# Altium PCB Effect_PCB.PcbDoc
Units mm, origin at the board's own origin, x right, y up, seen from the top; angles counter-clockwise.
Board outline 16 x 16 mm, 2 copper layers (Top Layer, Bottom Layer); 8 components, 6 nets, 18 pads, 5 vias.
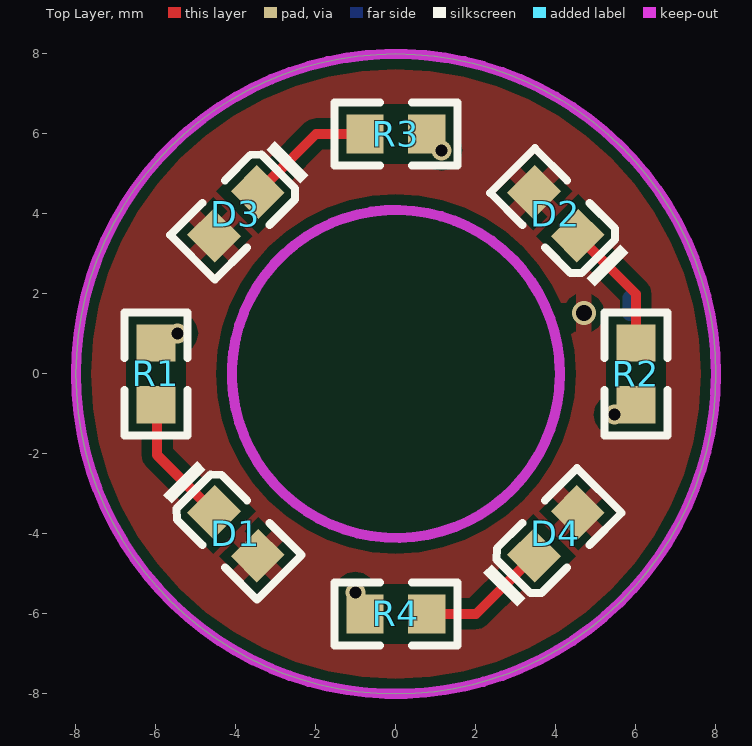
[diagram p0: Top Layer view]
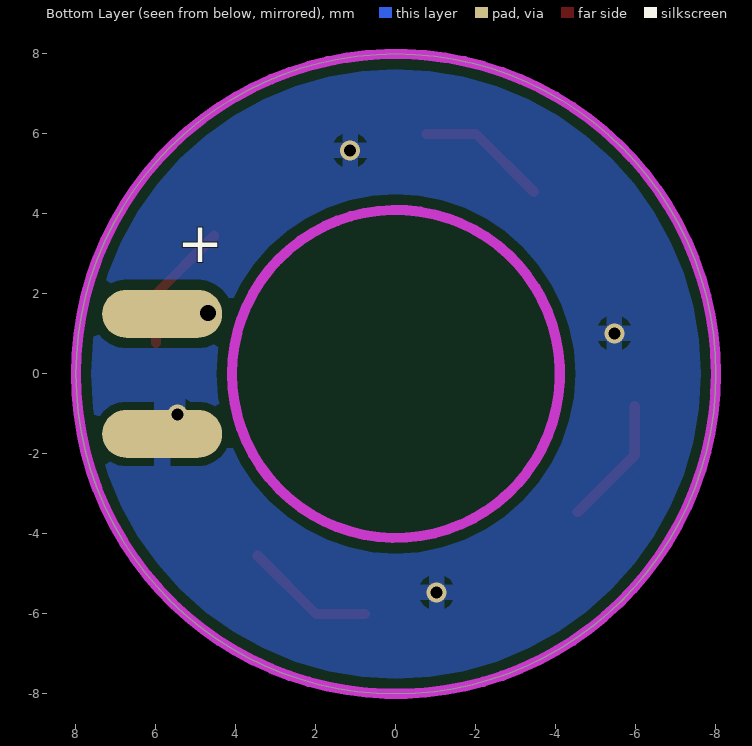
[diagram p1: Bottom Layer view, seen from below]
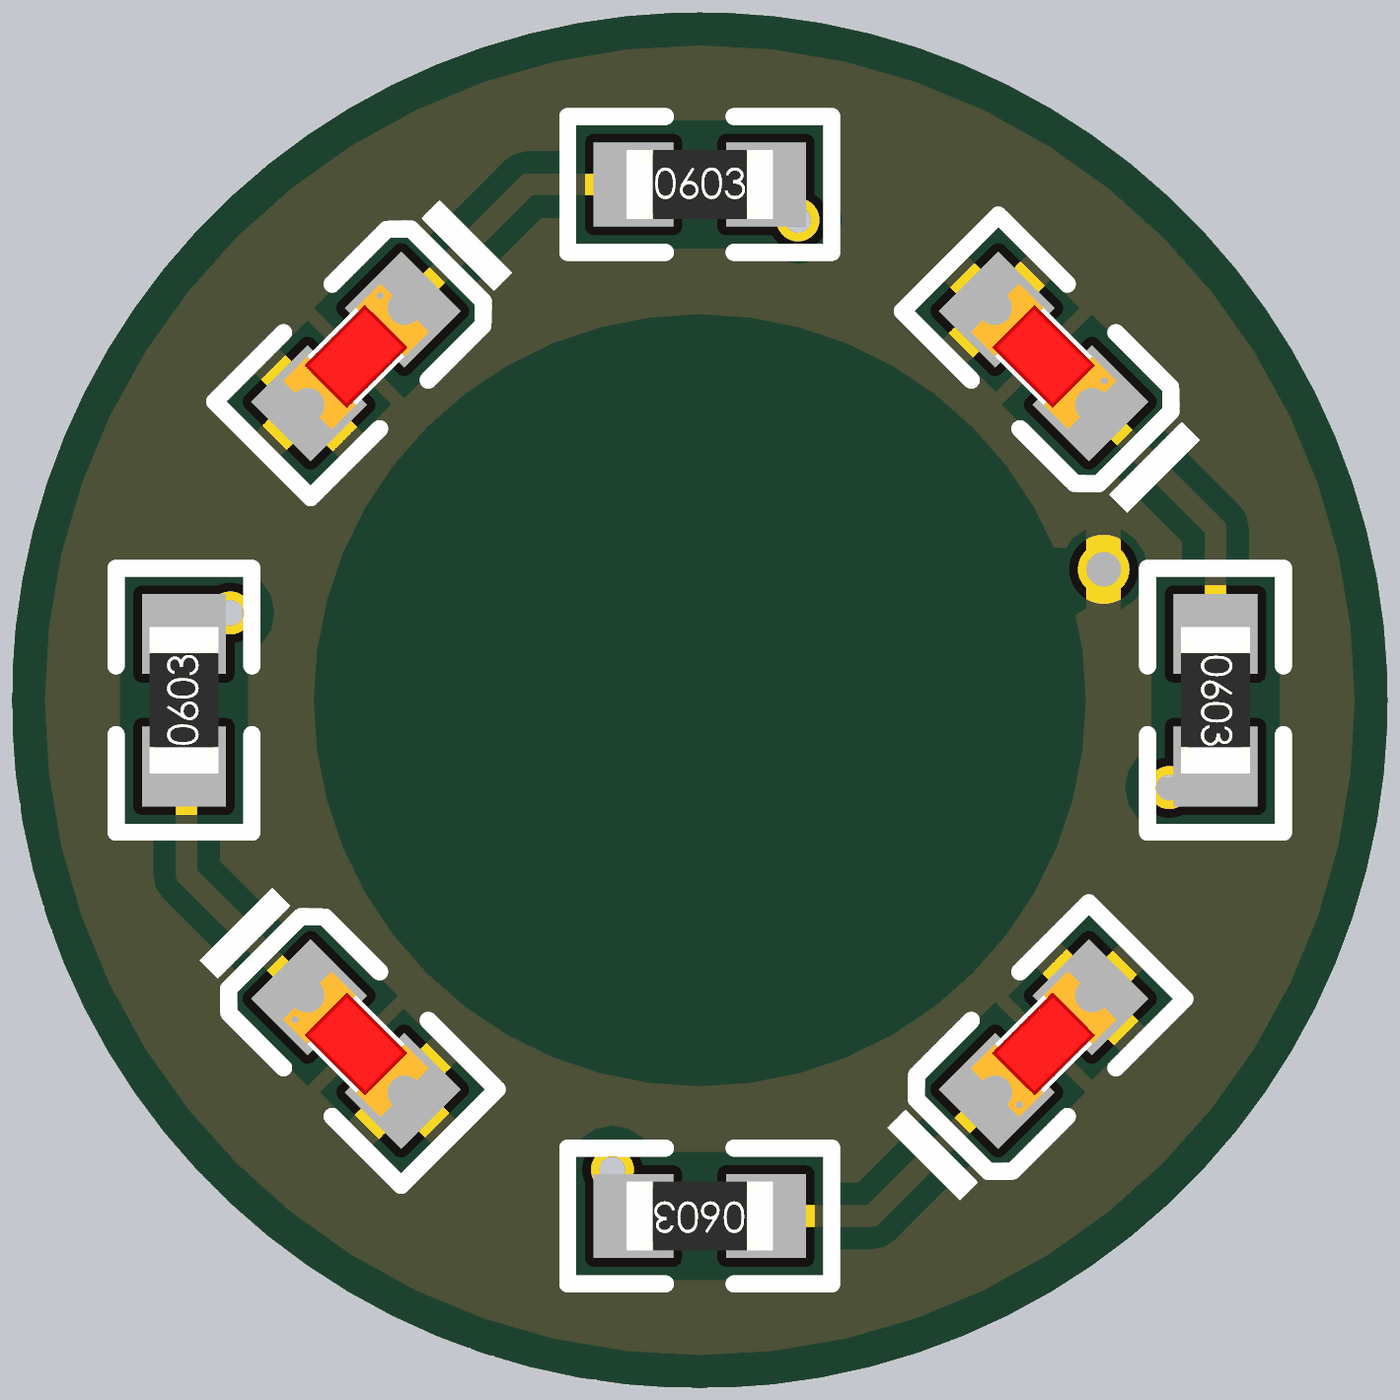
[diagram p2: 3D render of the assembled board from above, using the file's embedded part models]

## Layer stack, top to bottom
Top Solder: solder mask 0.0102, Solder Resist, Dk 3.5
Top Layer: signal copper 0.0356
Dielectric 1: dielectric 0.32, FR-4, Dk 4.8
Bottom Layer: signal copper 0.0356
Bottom Solder: solder mask 0.0102, Solder Resist, Dk 3.5

## Board outline
-8,0 ccw(c0,0) 0,-8 ccw(c0,0) 8,0 ccw(c0,0) 0,8 ccw(c0,0)

## Design rules (kind name [scope] priority, off if disabled: settings)
Clearance [All] p1: gap=0.254 ignorepadtopadclearanceinfootprint=FALSE except(0: Arc-Hole Track-Hole SMDPad-Hole THPad-Hole Via-Hole Fill-Hole Poly-Hole Region-Hole Text-Hole)
PlaneConnect [All] p1: planeconnectstyle=Relief reliefexpansion=0.508 reliefentries=4 reliefconductorwidth=0.34 reliefairgap=0.254
PolygonConnect [All] p1: connectstyle=Relief reliefconductorwidth=0.4 reliefentries=4 polygonreliefangle="90 Angle" airgapwidth=0.2
RoutingVias [All] p1: holewidth=0.711 width=1.27 viastyle="Through Hole" minholewidth=0.711 minwidth=1.27 maxholewidth=0.711 maxwidth=1.27
SolderMaskExpansion [All] p1: expansion=0.102
Width [All] p1: maxlimit=0.5 minlimit=0.254 preferedwidth=0.254
29 further rules are at their usual default settings.

## Components (designator, comment, footprint, x,y, rotation, side; value= is the part's Value field where it differs from the comment)
D1 "白灯 0603" 0603_LED_S1 -4,-4 r315 top
D2 "白灯 0603" 0603_LED_S1 4,4 r135 top
D3 "白灯 0603" 0603_LED_S1 -4,4 r225 top
D4 "白灯 0603" 0603_LED_S1 4,-4 r45 top
R1 "0Ω (0R0) ±1%" 0603_R -6,0 r90 top
R2 "0Ω (0R0) ±1%" 0603_R 6,0 r270 top
R3 "0Ω (0R0) ±1%" 0603_R 0,6 r0 top
R4 "0Ω (0R0) ±1%" 0603_R 0,-6 r180 top

## Footprints (in the part's own frame and the unit in brackets; to place one, negate y for a bottom-side part, rotate by r counter-clockwise, add the part's x,y. Pads: shape width x height; smd on the part's side, far side on the other; paste and mask are expansions set on the pad)
0603_LED_S1 [mm]
  rect 0.93x0.98 smd: A(0.77,0) K(-0.77,0)
  silkscreen extent -1.97,-0.79 1.54,0.79, body extent -0.8,-0.4 0.8,0.4, height 0.6
0603_R [mm]
  rect 0.93x0.98 smd: 1(-0.77,0) 2(0.77,0)
  silkscreen extent -1.53,-0.79 1.54,0.79, body extent -0.85,-0.4 0.85,0.4, height 0.56

## Part data
D1 D2 D3 D4: library part "0603 白灯", "发光二极管"
R1 R2 R3 R4: library part "0603 0Ω (0R0) 1%", "贴片电阻"

## Free pads (board coordinates)
  oval 3x1.2 smd far side: 0(5.842,1.5) 1(5.842,-1.5)

## Via types
v1: diameter 0.5, hole 0.3, Top Layer to Bottom Layer, 4 vias
v2: diameter 0.6, hole 0.4, Top Layer to Bottom Layer, 1 vias

## Nets (pads, with @x,y where several pads share a name; then routed paths per layer and width w, separated by ;. In a path a pad name is that pad's centre, name@x,y a point inside that pad or via, vN(x,y) a via of type N, cw(c..) or ccw(c..) an arc to the next point about the centre after c; other vN are vias at no path point)
3.3V: D1.A D2.A D3.A D4.A pad.0 | length 0.4
  Bottom Layer w0.35: pad.0 pad.0@5.842,1.905
  other v2: 4.699,1.524
GND: pad.1 R1.2 R2.2 R3.2 R4.2
  other v1: -1.016,-5.461 5.461,-1.016 -5.461,1.016 1.143,5.588
NetD1_K: D1.K R1.1 | length 3.2
  Top Layer w0.254: R1.1@-5.969,-0.801 -5.969,-2.031 D1.K
NetD2_K: D2.K R2.1 | length 3.3
  Top Layer w0.254: D2.K 6,2 R2.1
NetD3_K: D3.K R3.1 | length 3.3
  Top Layer w0.254: D3.K -2,6 R3.1
NetD4_K: D4.K R4.1 | length 3.3
  Top Layer w0.254: R4.1 2,-6 D4.K

## Polygon pours and split planes (outlines as drawn)
3.3V on Top Layer "GND" (solid, remove dead copper, pour order 2): -9.398,9.017 -9.271,9.144 10.287,9.144 10.287,-8.763 9.652,-9.398 9.398,-9.652 -8.763,-9.652
GND on Bottom Layer "GND" (solid, remove dead copper, pour order 4): -9.017,10.414 8.763,10.414 10.033,9.144 9.525,8.636 9.525,-8.636 -8.636,-8.636 -9.144,-8.128

## Keep-outs
Keep-Out Layer:
  circle w0.254: c0,0 r8
  circle w0.254: c0,0 r4.1

## Silkscreen, mask and mechanical layers (free items; w line width, h text height)
Bottom Overlay:
  text "+" at 5.461,2.794 h1
Bottom Solder:
  text "LED EFFECT" at -4.699,4.826 h1 r90
  text "Zealer" at 2.413,-6.858 h1